# EAGLE board RFBoardLayoutGen0_v01.2 (EAGLE 7.2.0)
AUTHOR: Kirchschlager Raimund
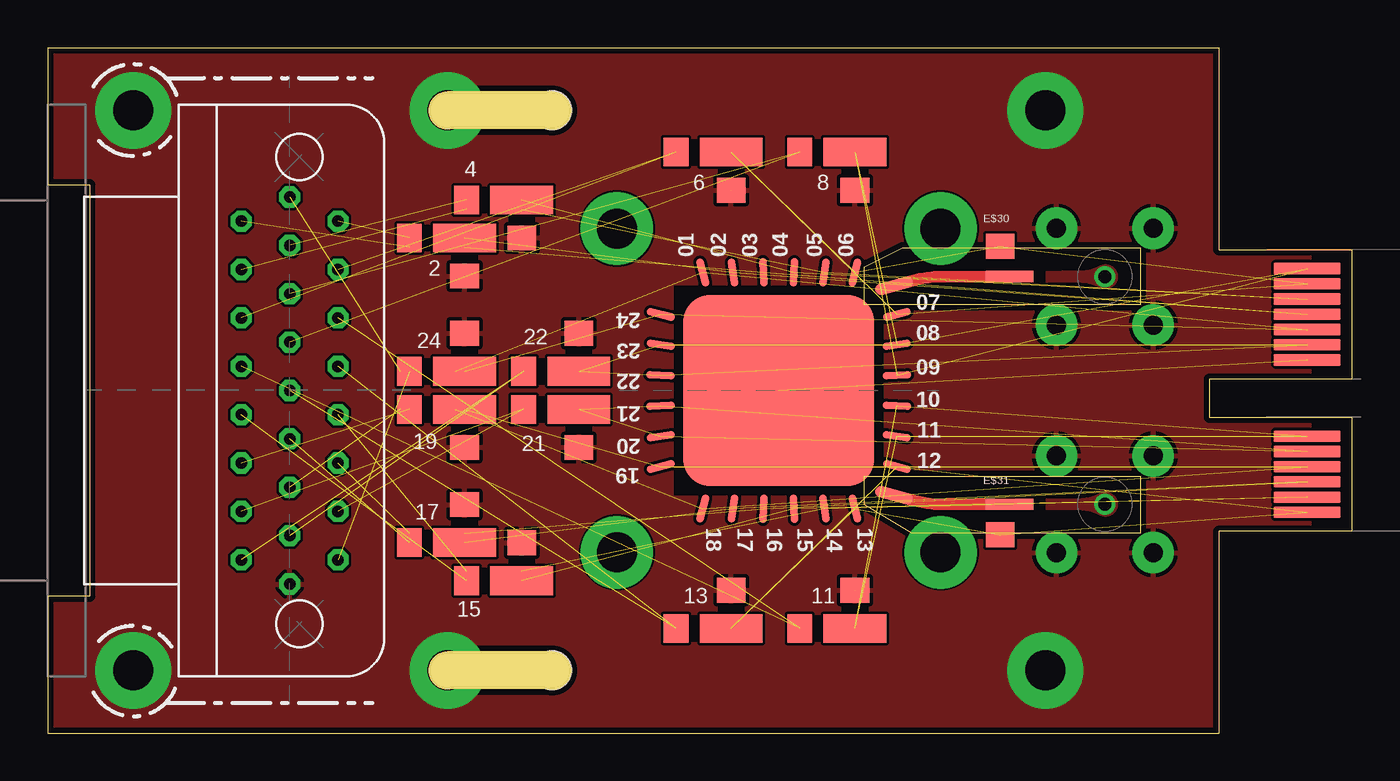
[diagram p0: board, top side]
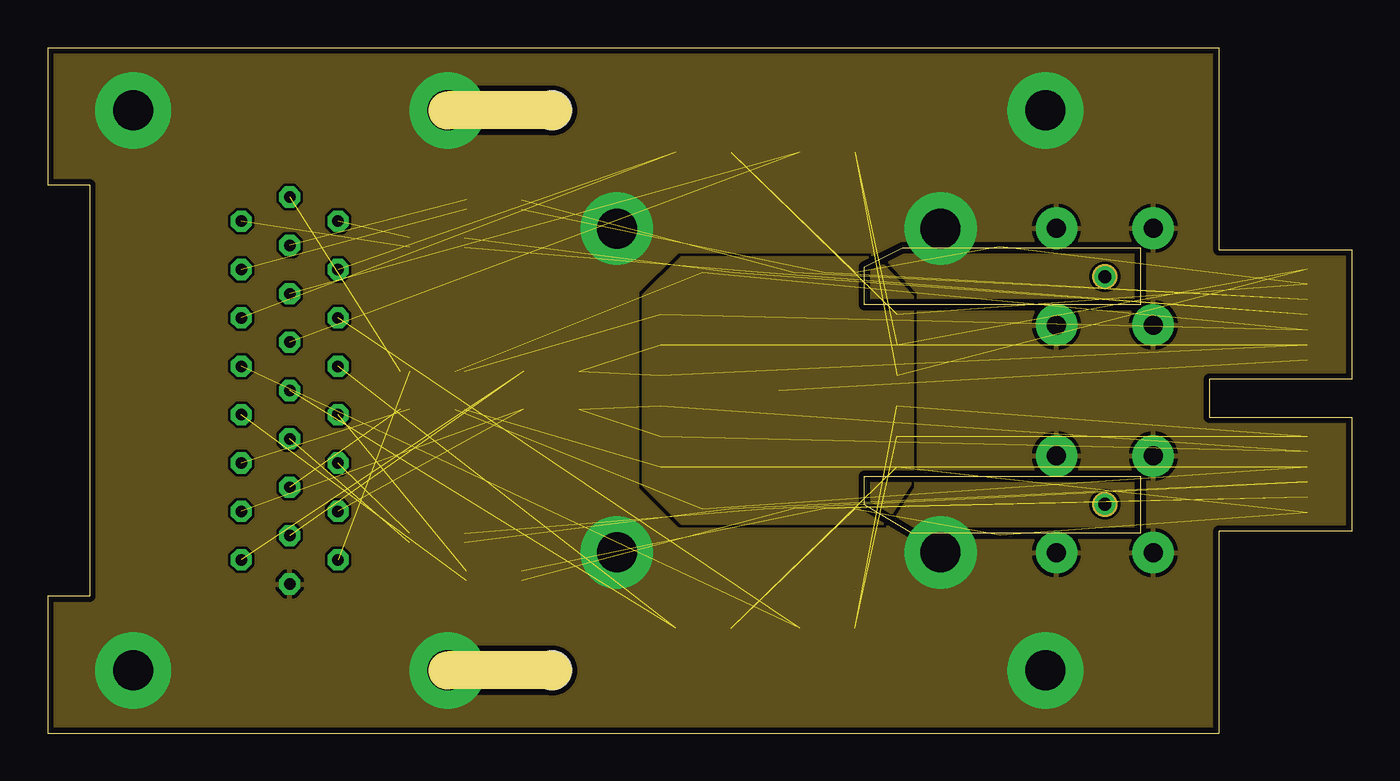
[diagram p1: board, inner layer Route2]
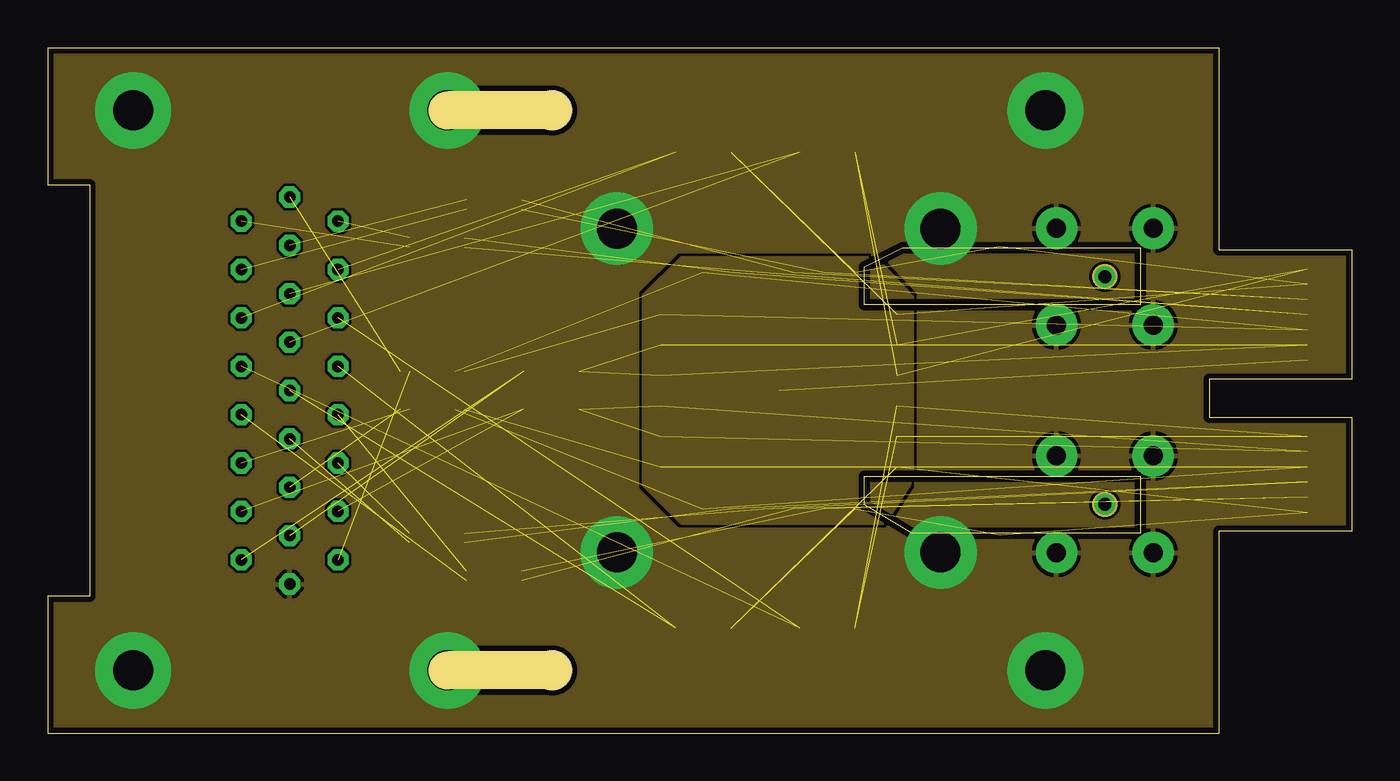
[diagram p2: board, inner layer Route15]
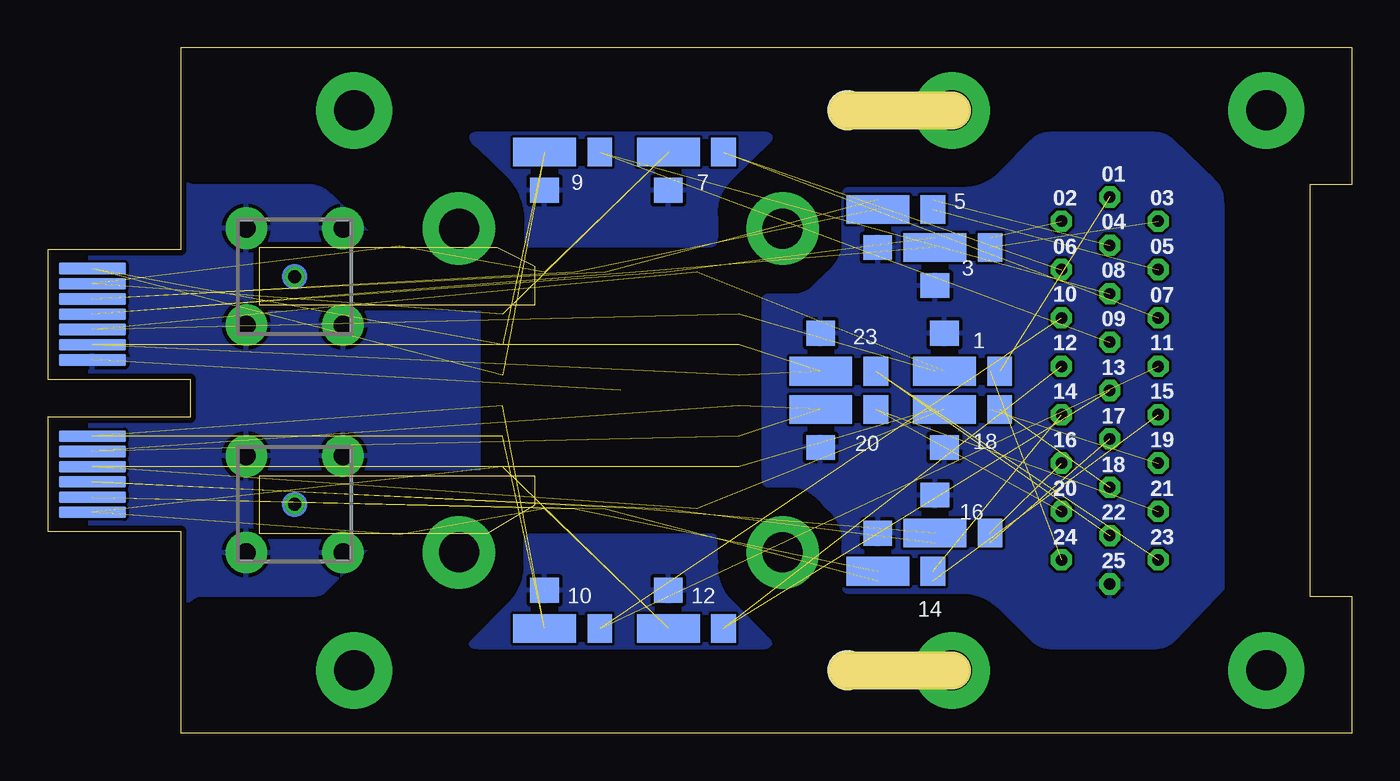
[diagram p3: board, bottom side, seen from below]

Size 68.5 x 36 mm. Coordinates in mm from the lower left corner, seen from the top.
Outline: 26.5,3.3 21,3.3
Outline: 26.5,32.7 21,32.7
Outline: 0,36 0,28.8 2.2,28.8 2.2,7.2 0,7.2 0,0 61.5,0 61.5,10.6 68.5,10.6 68.5,16.6 61,16.6 61,18.6 68.5,18.6 68.5,25.4 61.5,25.4 61.5,36 0,36
Outline: 57.4,25.5 57.4,22.5 42.9,22.5 42.9,24.5 44.9,25.5 57.4,25.5
Outline: 57.4,13.5 57.4,10.5 45.4,10.5 42.9,12 42.9,13.5 57.4,13.5
Copper layers (1+2*15+16): Top 0.035mm / dielectric 0.38mm / Route2 0.035mm / dielectric 0.71mm / Route15 0.035mm / dielectric 0.38mm / Bottom 0.035mm
Design rules "PCB-POOL HighSpec_ML4+ *": minimum track width 0.125mm, minimum drill 0.2mm, track to track 0.125mm, track to pad 0.125mm, pad to pad 0.125mm, via to via 0.125mm, smd to smd 0.125mm, copper to edge 0.3mm, drill to drill 0.2mm, minimum pad ring 10mil, minimum via ring 8mil, stop-mask expansion 0.075mm, vias tented up to drill 0.2mm, thermal gap 0.2mm
Net classes: 0 GND: clearance 0.15 mm; 1 RF: clearance 0.3 mm
Holes 2 mm at 26.5,32.7 26.5,3.3
tRestrict: area 32.9,12.5 to 43.9,23.5; area 44.9,24.5 to 48.9,28.5; area 27.9,24.5 to 31.9,28.5; area 27.9,7.5 to 31.9,11.5; area 44.9,7.5 to 48.9,11.5; area 66.4,10 to 69.4,26; area 27.9,24.5 to 31.9,28.5; 4 lines
bRestrict: area -0.4,-0.4 to 61.8,36.4; area 66.4,10 to 69.4,26
vRestrict: area -0.4,-0.4 to 61.8,36.4; area 51.2,24.7 to 54.8,28.3; area 56.3,24.7 to 59.9,28.3; area 56.2,19.7 to 59.8,23.3; area 51.2,19.6 to 54.8,23.2; area 51.2,12.8 to 54.8,16.4; area 56.3,12.8 to 59.9,16.4; area 56.3,7.7 to 59.9,11.3; area 51.2,7.7 to 54.8,11.3

## Footprints (pad centres in the part's own frame; a part is rotated, then mirrored left to right if it is on the bottom)
24DC+4RF/400MU-PADS/10.0X10.0_V1.1 = smd 10 x 10: BASE 0,0 | smd 2 x 0.6 rotated 345: P$1 6.05,-5.5 | smd 1.5 x 0.4 rotated 267: P$2 0.8,6.2 | smd 1.5 x 0.4 rotated 93: P$4 0.8,-6.2; P$40 -0.8,6.2 | smd 1.5 x 0.4 rotated 345: P$26 -6.2,4; P$37 6.2,-4 | smd 1.5 x 0.4 rotated 351: P$27 -6.2,2.4; P$36 6.2,-2.4 | smd 1.5 x 0.4 rotated 357: P$28 -6.2,0.8; P$35 6.2,-0.8 | smd 1.5 x 0.4 rotated 3: P$29 -6.2,-0.8; P$34 6.2,0.8 | smd 1.5 x 0.4 rotated 9: P$30 -6.2,-2.4; P$33 6.2,2.4 | smd 1.5 x 0.4 rotated 15: P$31 -6.2,-4; P$32 6.2,4 | smd 1.5 x 0.4 rotated 105: P$38 -4,6.2; P$49 4,-6.2 | smd 1.5 x 0.4 rotated 99: P$39 -2.4,6.2; P$48 2.4,-6.2 | smd 1.5 x 0.4 rotated 81: P$42 2.4,6.2; P$45 -2.4,-6.2 | smd 1.5 x 0.4 rotated 75: P$43 4,6.2; P$44 -4,-6.2 | smd 1.5 x 0.4 rotated 87: P$46 -0.8,-6.2 | smd 2 x 0.6 rotated 15: RF1@1 6.05,5.5
25_SOCKET_M83513/13-D = drill 0.6 octagon: 01 10.16,0; 02 8.89,2.54; 03 6.35,2.54; 04 3.81,2.54; 05 2.54,0; 06 1.27,2.54; 07 0,0; 08 -1.27,2.54; 09 -2.54,0; 10 -3.81,2.54; 11 -6.35,2.54; 12 -8.89,2.54; 13 -10.16,0; 14 8.89,-2.54; 15 7.62,0; 16 6.35,-2.54; 17 5.08,0; 18 3.81,-2.54; 19 1.27,-2.54; 20 -1.27,-2.54; 21 -3.81,-2.54; 22 -5.08,0; 23 -6.35,-2.54; 24 -7.62,0; 25 -8.89,-2.54
MEC8-113-02-L-D-RA1 = smd 0.6 x 3.5: 129 -6.4,0.15; 130 -5.6,0.15; 131 -4.8,0.15; 132 -4,0.15; 133 -3.2,0.15; 134 -2.4,0.15; 135 -1.6,0.15; 136 2.4,0.15; 137 3.2,0.15; 138 4,0.15; 139 4.8,0.15; 140 5.6,0.15; 141 6.4,0.15 | smd 0.6 x 3.5 bottom: 157 -6.4,0.15; 158 -5.6,0.15; 159 -4.8,0.15; 160 -4,0.15; 161 -3.2,0.15; 162 -2.4,0.15; 163 -1.6,0.15; 168 2.4,0.15; 169 3.2,0.15; 170 4,0.15; 171 4.8,0.15; 172 5.6,0.15; 173 6.4,0.15
LP-FILTER/1_STAGE/OS/V1_01 = smd 1.3 x 1.5: $1 -2.9,0.01 | smd 3.3 x 1.5: $2 0,0.01 | smd 1.5 x 1.3: GND@1 0,-1.99
LP-FILTER/1_STAGE/OS/V1_02 = smd 3.3 x 1.5: $4 0,0.01 | smd 1.3 x 1.5: $6 -2.9,0.01 | smd 1.5 x 1.3: GND@3 0,2.01
LP-FILTER/1_STAGE/OS/V1_03 = smd 3.3 x 1.5 bottom: $4 0,0.01 | smd 1.3 x 1.5 bottom: $6 -2.9,0.01 | smd 1.5 x 1.3 bottom: GND@3 0,2.01
LP-FILTER/1_STAGE/OS/V1_04 = smd 1.3 x 1.5 bottom: $1 -2.9,0.01 | smd 3.3 x 1.5 bottom: $2 0,0.01 | smd 1.5 x 1.3 bottom: GND@1 0,-1.99
SMP_STRAIGHT_V02 = drill 1 pad 2.184: P$3 -2.54,2.54; P$4 2.54,2.54; P$5 2.54,-2.54; P$6 -2.54,-2.54
BIAS_TEE_DOWN_V01 = smd 1.5 x 1.3: P$1 0,0.95 | smd 2.5 x 0.6: P$2 0.5,-0.65
BIAS_TEE_UP_V01 = smd 1.5 x 1.3: P$1 0,-0.95 | smd 2.5 x 0.6: P$2 0.5,0.65

## Placement (x,y rotation side)
E$1  [24DC+4RF/400MU-PADS/10.0X10.0_V1.1]  38.4,18 0 top
E$2  [25_SOCKET_M83513/13-D]  12.71,18 90 top
E$3  [MEC8-113-02-L-D-RA1]  66,18 270 top
E$4  [LP-FILTER/1_STAGE/OS/V1_01]  24.9,28 0 top
E$5  [LP-FILTER/1_STAGE/OS/V1_02]  24.9,8 0 top
E$6  [LP-FILTER/1_STAGE/OS/V1_01]  21.9,26 0 top
E$7  [LP-FILTER/1_STAGE/OS/V1_01]  21.9,17 0 top
E$8  [LP-FILTER/1_STAGE/OS/V1_02]  21.9,19 0 top
E$9  [LP-FILTER/1_STAGE/OS/V1_02]  35.9,5.5 0 top
E$10  [LP-FILTER/1_STAGE/OS/V1_01]  35.9,30.5 0 top
E$11  [LP-FILTER/1_STAGE/OS/V1_02]  27.9,19 0 top
E$12  [LP-FILTER/1_STAGE/OS/V1_02]  21.9,10 0 top
E$13  [LP-FILTER/1_STAGE/OS/V1_02]  42.4,5.5 0 top
E$14  [LP-FILTER/1_STAGE/OS/V1_01]  42.4,30.5 0 top
E$15  [LP-FILTER/1_STAGE/OS/V1_01]  27.9,17 0 top
E$16  [LP-FILTER/1_STAGE/OS/V1_03]  21.4,19 0 top
E$17  [LP-FILTER/1_STAGE/OS/V1_03]  21.9,10.5 0 top
E$18  [LP-FILTER/1_STAGE/OS/V1_03]  24.9,8.5 0 top
E$19  [LP-FILTER/1_STAGE/OS/V1_03]  27.9,19 0 top
E$20  [LP-FILTER/1_STAGE/OS/V1_04]  24.9,27.5 0 top
E$21  [LP-FILTER/1_STAGE/OS/V1_04]  21.4,17 0 top
E$22  [LP-FILTER/1_STAGE/OS/V1_04]  27.9,17 0 top
E$23  [LP-FILTER/1_STAGE/OS/V1_04]  21.9,25.5 0 top
E$24  [LP-FILTER/1_STAGE/OS/V1_04]  35.9,30.5 0 top
E$25  [LP-FILTER/1_STAGE/OS/V1_04]  42.4,30.5 0 top
E$26  [SMP_STRAIGHT_V02]  55.52,23.98 0 top
E$27  [LP-FILTER/1_STAGE/OS/V1_03]  35.9,5.5 0 top
E$28  [LP-FILTER/1_STAGE/OS/V1_03]  42.4,5.5 0 top
E$29  [SMP_STRAIGHT_V02]  55.52,12.03 0 top
E$30  [BIAS_TEE_DOWN_V01]  50.02,24.62 0 top
E$31  [BIAS_TEE_UP_V01]  50.02,11.38 0 top

## Library data of the parts
E$1 = SampleArea
E$2 = Glenair
E$3 = MEC8-130-02-X-D-RA1
E$4-E$25 E$27 E$28 = LPFilter
E$26 E$29 = RF Connectors
E$30 E$31 = Bias tee

## Nets
GND1: E$2.13 E$3.163 E$4.GND@1 E$5.GND@3 E$6.GND@1 E$7.GND@1 E$8.GND@3 E$9.GND@3 E$10.GND@1 E$11.GND@3 E$12.GND@3 E$13.GND@3 E$14.GND@1 E$15.GND@1 E$16.GND@3 E$17.GND@3 E$18.GND@3 E$19.GND@3 E$20.GND@1 E$21.GND@1 E$22.GND@1 E$23.GND@1 E$24.GND@1 E$25.GND@1 E$26.P$3 E$26.P$4 E$26.P$5 E$26.P$6 E$27.GND@3 E$28.GND@3 E$29.P$3 E$29.P$4 E$29.P$5 E$29.P$6
S$55: E$1.P$28 E$3.134 E$11.$4
S$67: E$2.24 E$11.$6
S$68: E$1.P$29 E$3.137 E$15.$2
S$76: E$2.11 E$15.$1
S$79: E$1.P$27 E$3.162 E$19.$4
S$80: E$2.12 E$19.$6
S$81: E$1.P$30 E$3.169 E$22.$2
S$83: E$2.23 E$22.$1
S$84: E$1.P$26 E$3.133 E$8.$4
S$85: E$2.25 E$8.$6
S$86: E$1.P$38 E$3.161 E$16.$4
S$88: E$2.01 E$16.$6
S$89: E$1.P$31 E$3.138 E$7.$2
S$90: E$2.10 E$7.$1
S$91: E$1.P$44 E$3.170 E$21.$2
S$95: E$2.22 E$21.$1
S$116: E$1.P$39 E$3.132 E$6.$2
S$144: E$2.14 E$6.$1
S$145: E$1.P$40 E$3.160 E$23.$2
S$146: E$2.02 E$23.$1
S$147: E$1.P$2 E$3.131 E$4.$2
S$149: E$2.15 E$4.$1
S$150: E$1.P$42 E$3.159 E$20.$2
S$151: E$2.03 E$20.$1
S$152: E$1.P$45 E$3.139 E$12.$4
S$154: E$2.09 E$12.$6
S$155: E$1.P$46 E$3.171 E$17.$4
S$156: E$2.21 E$17.$6
S$157: E$1.P$4 E$3.140 E$5.$4
S$158: E$2.08 E$5.$6
S$159: E$1.P$48 E$3.172 E$18.$4
S$160: E$2.20 E$18.$6
S$161: E$1.P$43 E$3.130 E$10.$2 E$30.P$1
S$162: E$2.16 E$10.$1
S$163: E$1.P$32 E$3.158 E$24.$2
S$164: E$2.04 E$24.$1
S$166: E$1.P$49 E$3.173 E$9.$4 E$31.P$1
S$167: E$1.P$33 E$3.129 E$14.$2
S$168: E$2.17 E$14.$1
S$169: E$1.P$34 E$3.157 E$25.$2
S$170: E$2.05 E$25.$1
S$171: E$2.07 E$9.$6
S$172: E$1.P$37 E$3.141 E$27.$4
S$173: E$2.19 E$27.$6
S$174: E$1.P$36 E$3.168 E$13.$4
S$175: E$2.06 E$13.$6
S$177: E$1.P$35 E$3.136 E$28.$4
S$178: E$2.18 E$28.$6
S$181: E$1.BASE E$3.135

## Tracks (layer width: path | path; a pad name or v marks a point on that pad's centre or on a via)
GND1  (via drill 2.1 pad 3.8, 2.1 pad 4)  (2 unrouted)
  other vias: 46.9,26.5 52.4,32.7 21,32.7 29.9,26.5 29.9,9.5 46.9,9.5 4.5,32.7 4.5,3.3 21,3.3 52.4,3.3
  pour Top (rank 6): -4.85,39.6 73.1,39.7 73.1,-4.7 -4.85,-4.8
  pour Route2 (rank 6): -7.5,41.1 73.6,41.6 73.6,-5.15 -7.5,-5.65
  pour Route15 (rank 6): -11.25,44.5 75.9,44.5 75.9,-11.4 -11.25,-11.4
  pour Bottom (rank 6): -16.65,49.3 78.15,49.2 78.15,-15.85 -16.65,-15.75
RF1
  Top 0.6: 43.8,23.32 45.42,23.76 arc-15 47.01,23.98 51,23.98
RF2
  Top 0.6: 51,12.03 47.01,12.03 arc-15 45.42,12.24 43.78,12.68
RF3  (via drill 0.7)
  other vias: 55.52,23.98
  pour Top: 52.42,24.27 54.12,24.27 arc27 55.27,24.55 arc-234 55.27,23.4 arc27 54.12,23.68 52.42,23.68
RF4  (via drill 0.7)
  other vias: 55.52,12.03
  pour Top: 52.42,12.32 54.12,12.32 arc27 55.27,12.6 arc-234 55.27,11.45 arc27 54.12,11.72 52.42,11.72
S$1
  Route15 1.3: 55.5,23.98 55.55,23.98
S$2
  Route2 1.3: 55.5,23.98 55.55,23.98
S$12
  Route2 1.3: 55.5,12.03 55.55,12.03
S$17
  Bottom 1.3: 55.5,23.98 55.55,23.98
S$55  (2 unrouted)
S$67  (1 unrouted)
S$68  (2 unrouted)
S$76  (1 unrouted)
S$79  (2 unrouted)
S$80  (1 unrouted)
S$81  (2 unrouted)
S$82
  pour Route15: 43.96,11.01 33.3,11.01 31.3,12.99 31.3,23.02 33.3,25 43.5,25 45.43,22.94 45.43,13.29
S$83  (1 unrouted)
S$84  (2 unrouted)
S$85  (1 unrouted)
S$86  (2 unrouted)
S$88  (1 unrouted)
S$89  (2 unrouted)
S$90  (1 unrouted)
S$91  (2 unrouted)
S$95  (1 unrouted)
S$116  (2 unrouted)
S$144  (1 unrouted)
S$145  (2 unrouted)
S$146  (1 unrouted)
S$147  (2 unrouted)
S$149  (1 unrouted)
S$150  (2 unrouted)
S$151  (1 unrouted)
S$152  (2 unrouted)
S$154  (1 unrouted)
S$155  (2 unrouted)
S$156  (1 unrouted)
S$157  (2 unrouted)
S$158  (1 unrouted)
S$159  (2 unrouted)
S$160  (1 unrouted)
S$161  (3 unrouted)
S$162  (1 unrouted)
S$163  (2 unrouted)
S$164  (1 unrouted)
S$165
  pour Route2: 43.96,11.01 33.3,11.01 31.3,12.99 31.3,23.02 33.3,25 43.5,25 45.43,22.94 45.43,13.29
S$166  (3 unrouted)
S$167  (2 unrouted)
S$168  (1 unrouted)
S$169  (2 unrouted)
S$170  (1 unrouted)
S$171  (1 unrouted)
S$172  (2 unrouted)
S$173  (1 unrouted)
S$174  (2 unrouted)
S$175  (1 unrouted)
S$176
  Bottom 1.3: 55.5,12.03 55.55,12.03
S$177  (2 unrouted)
S$178  (1 unrouted)
S$180
  Route15 1.3: 55.5,12.03 55.55,12.03
S$181  (1 unrouted)

## Text on the board
tPlace: 4 | 6 | 8 | 2 | 24 | 22 | 19 | 21 | 17 | 13 | 11 | 15
bPlace: 01 | 03 | 02 | 5 | 7 | 9 | 04 | 05 | 06 | 08 | 3 | 07 | 10 | 09 | 11 | 12 | 13 | 1 | 23 | 15 | 14 | 17 | 19 | 16 | 18 | 20 | 18 | 21 | 20 | 22 | 23 | 24 | 16 | 25 | 12 | 10 | 14
CopperPlate: 03